# Altium PCB 175-00008 rev 1, PCB, M2 Focus Drive_OLD.PcbDoc (part 1 of 2)
Units mil, origin at the board's own origin, x right, y up, seen from the top; angles counter-clockwise.
Board outline 6885.96 x 6885.86 mil, 8 copper layers (Top Layer (*.GTL), Mid-Layer 1 (*.G1), +24V (*.GP1), GND (*.GP2), +5V (*.GP3), +12V (*.GP4), -12V (*.GP5), Bottom Layer (*.GBL)); 112 components, 149 nets, 812 pads, 83 vias.
Unrouted connection lines stored in the file: 204.
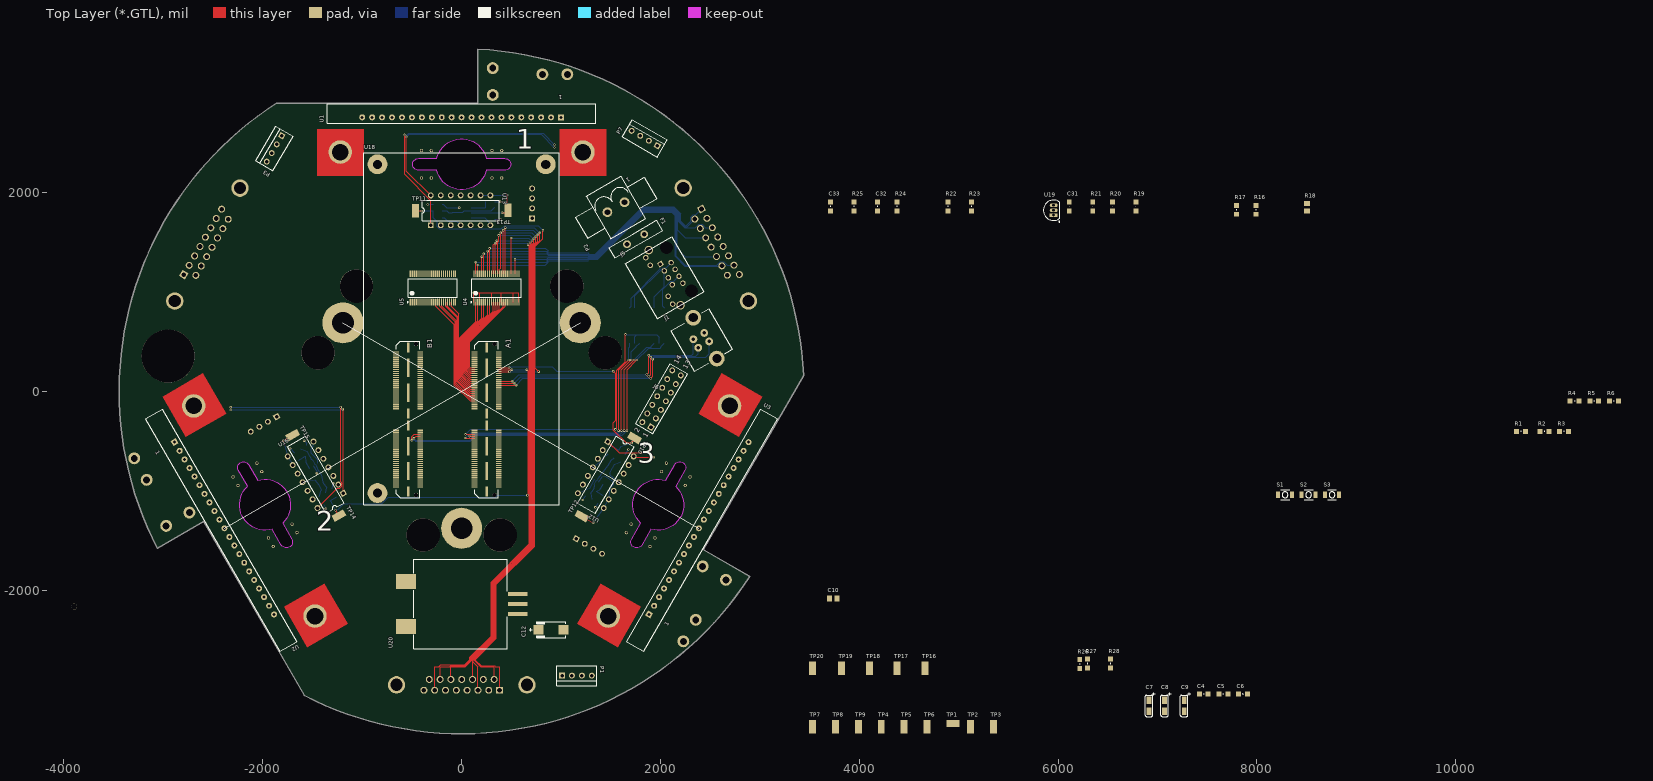
[diagram p0: Top Layer (*.GTL) view]
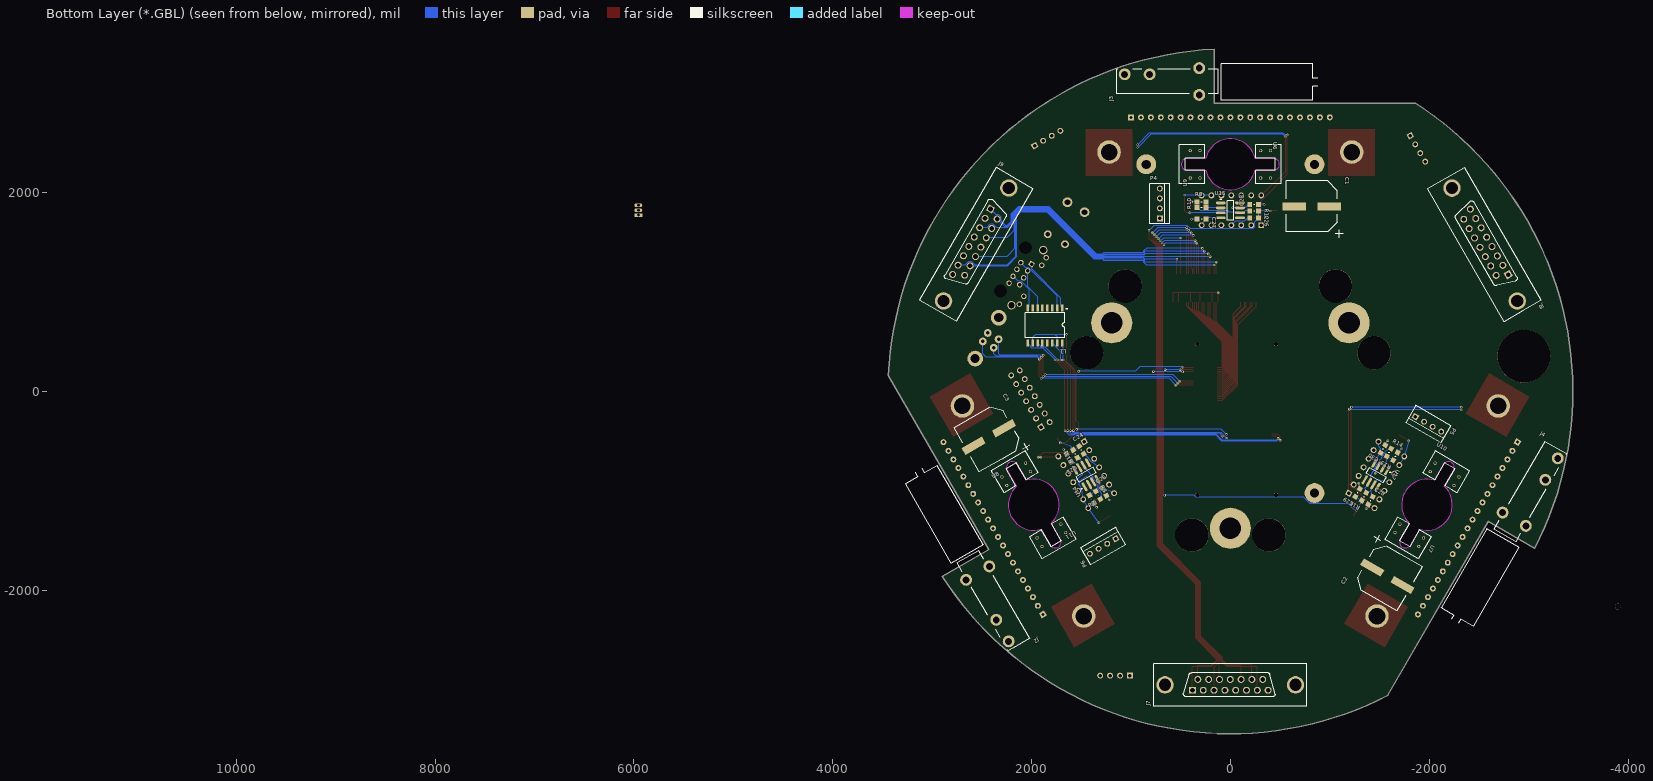
[diagram p1: Bottom Layer (*.GBL) view, seen from below]
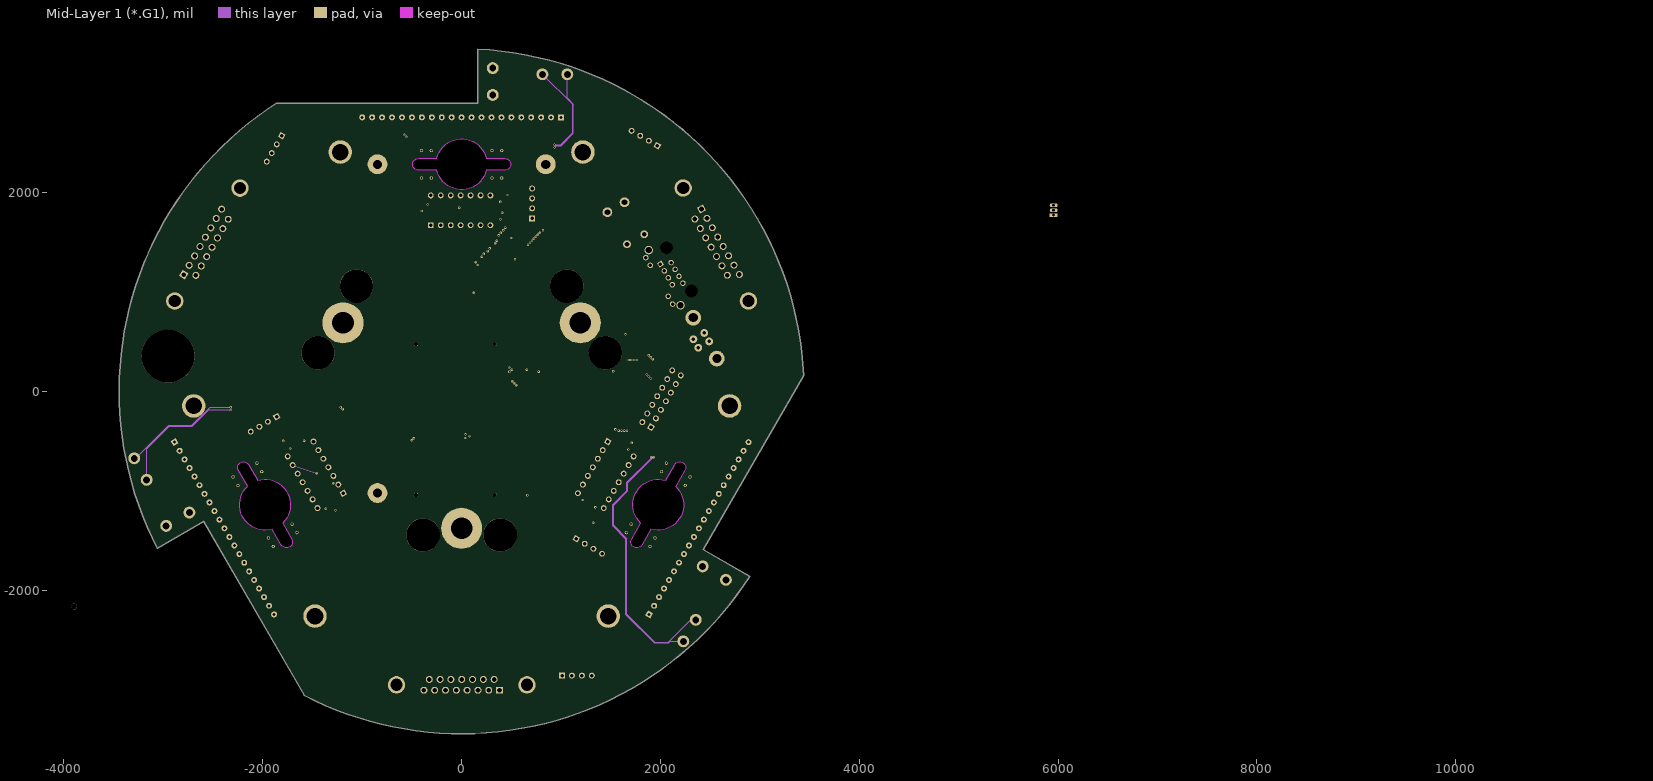
[diagram p2: Mid-Layer 1 (*.G1)]
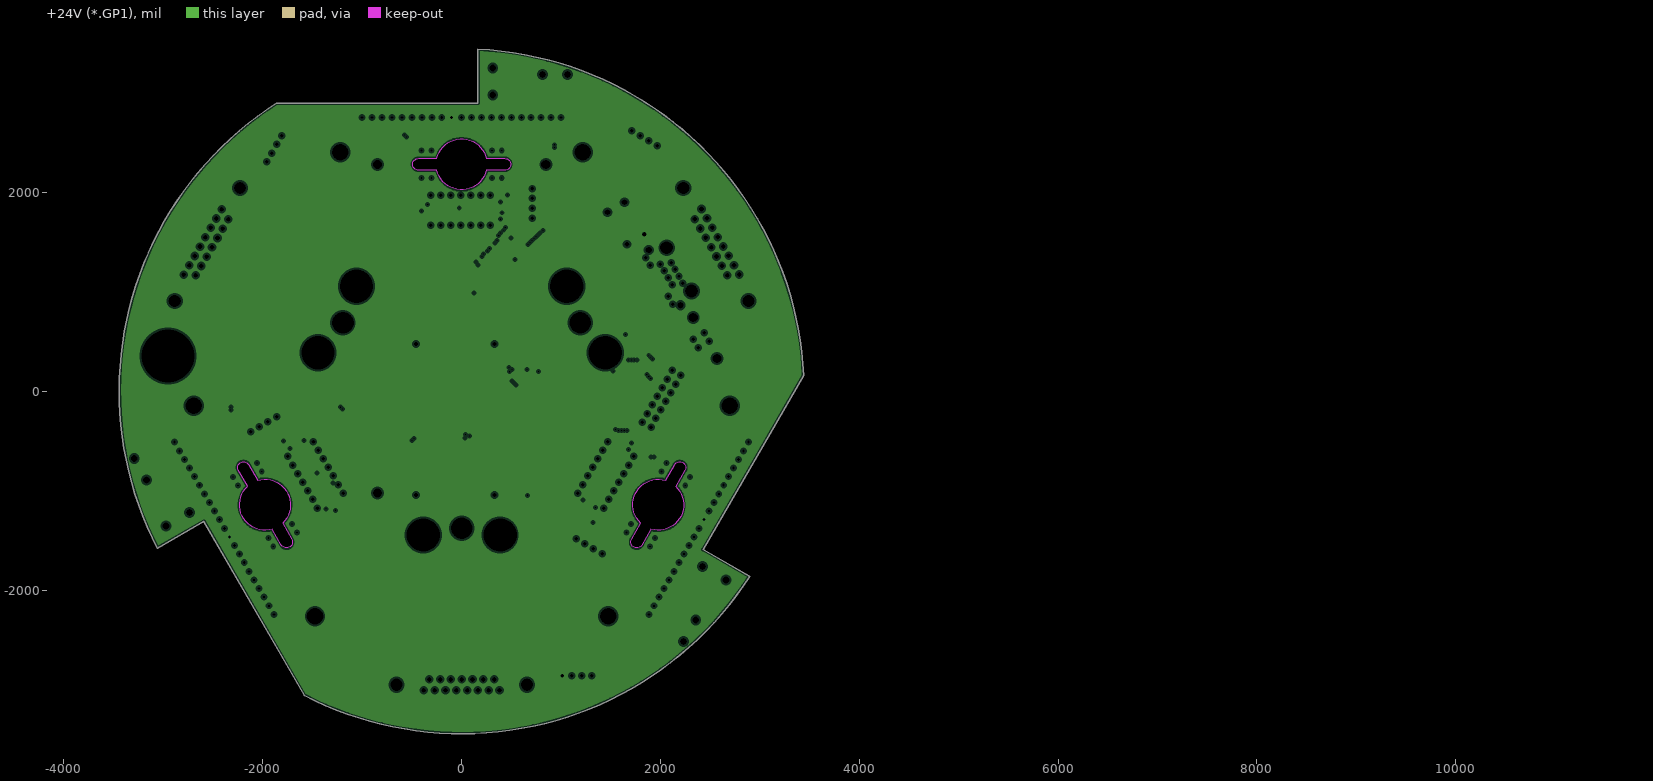
[diagram p3: +24V (*.GP1), clearances drawn from the general rule]
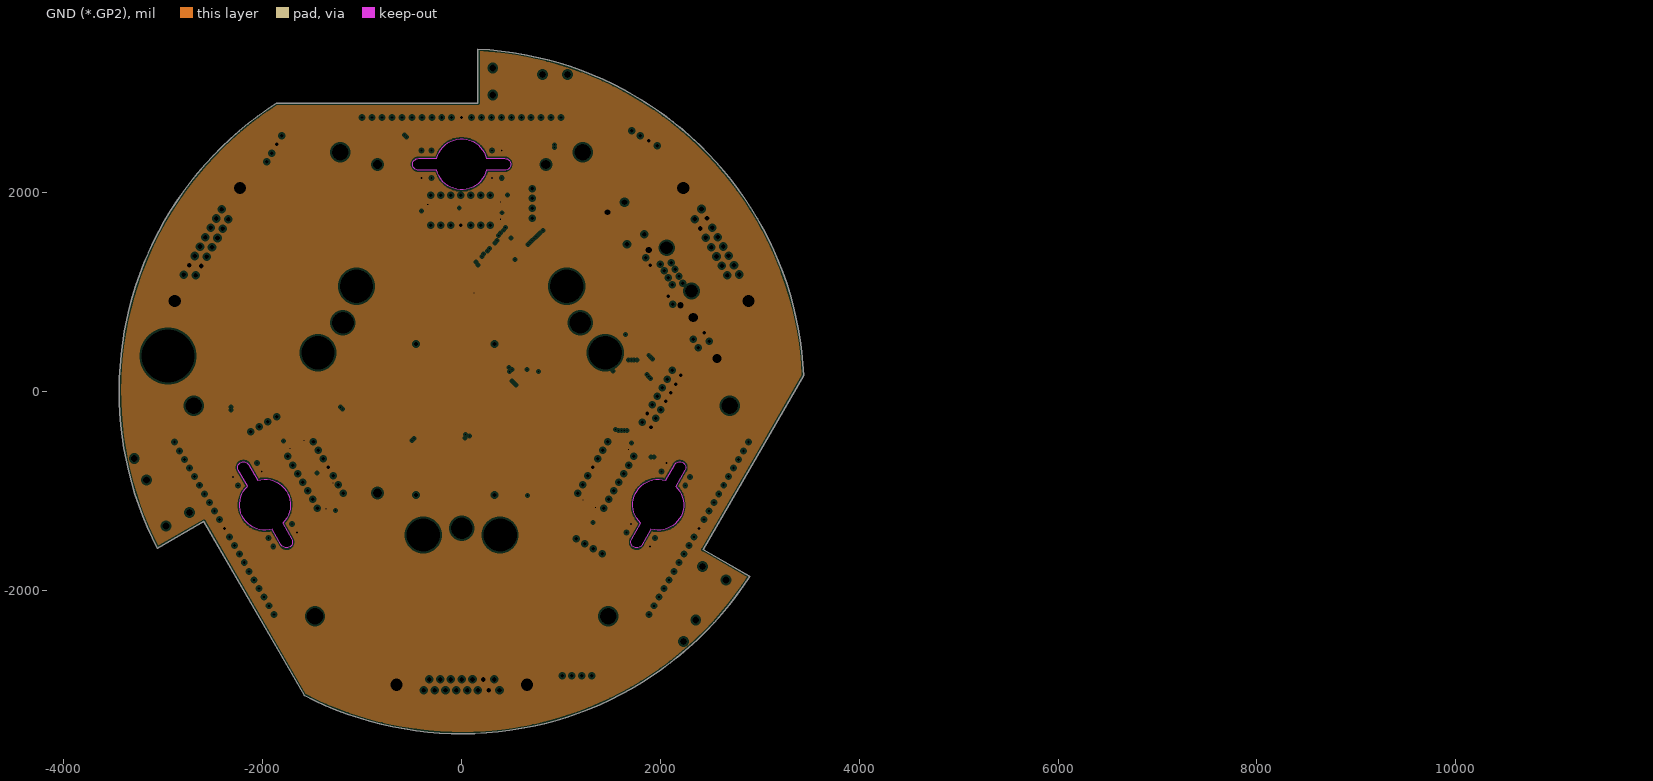
[diagram p4: GND (*.GP2), clearances drawn from the general rule]
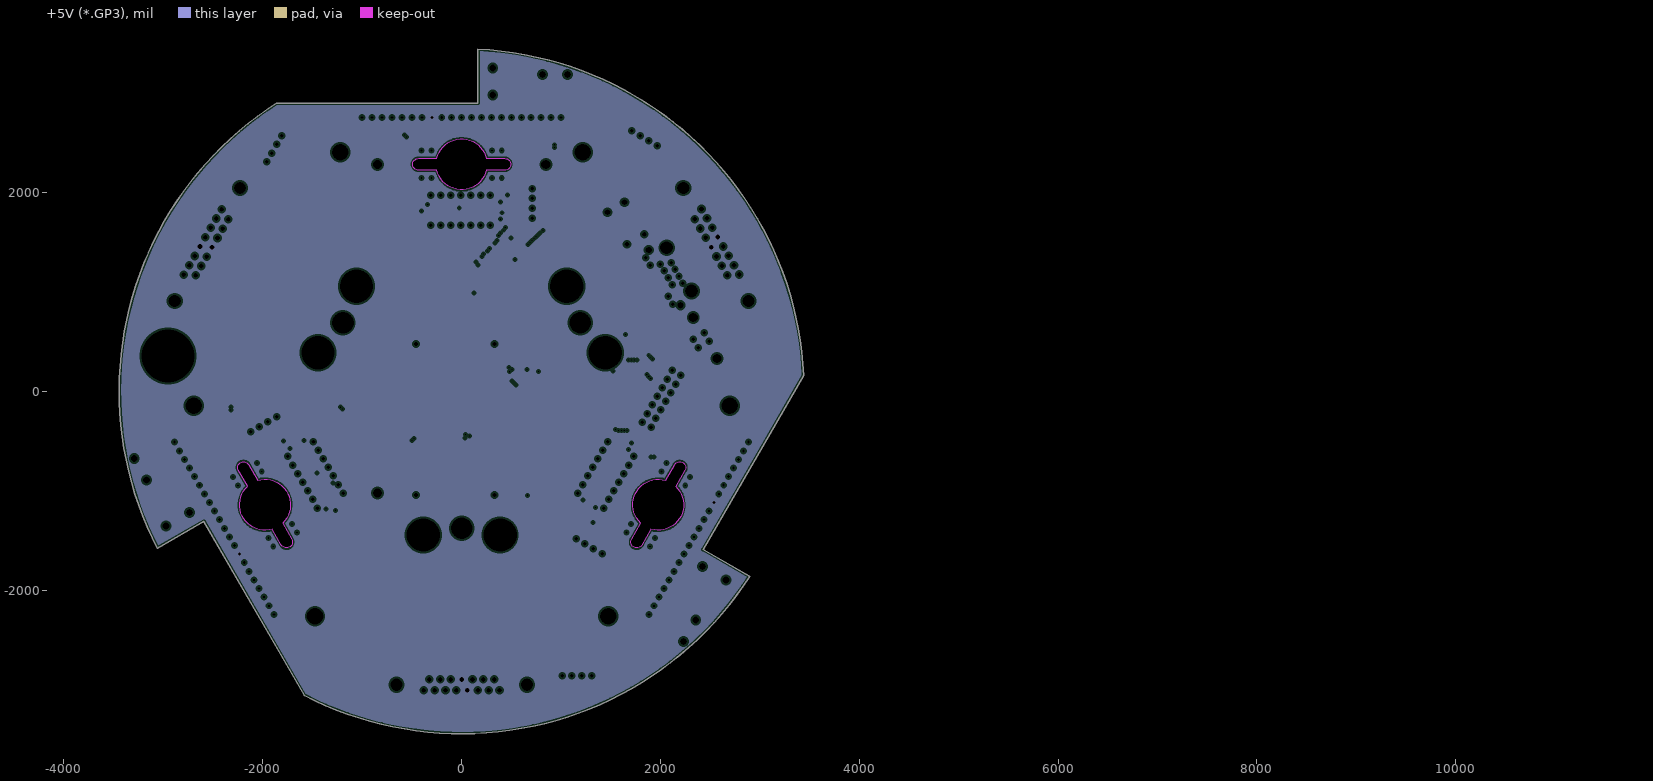
[diagram p5: +5V (*.GP3), clearances drawn from the general rule]
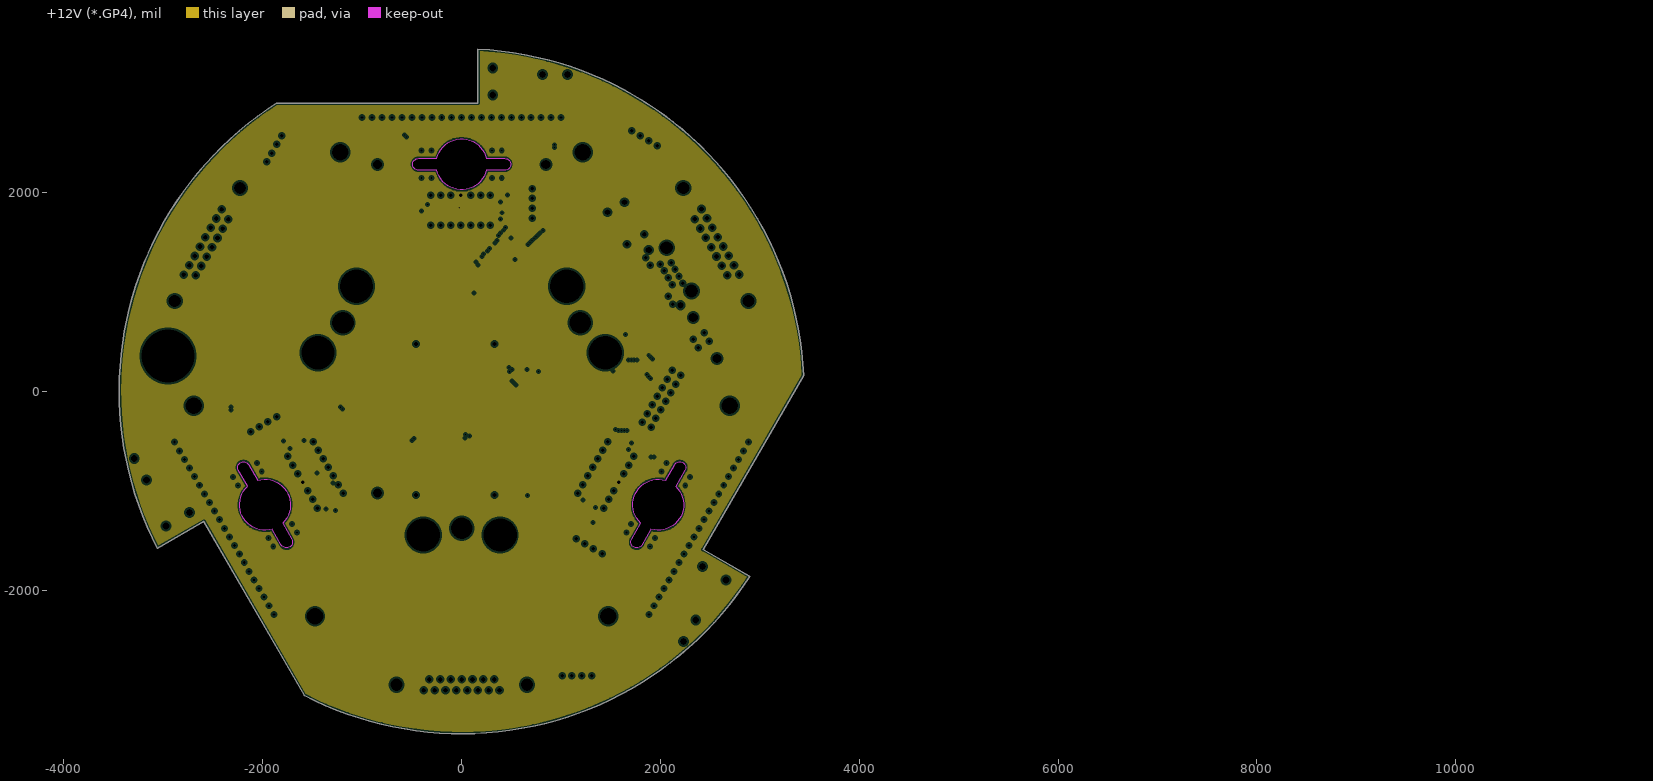
[diagram p6: +12V (*.GP4), clearances drawn from the general rule]
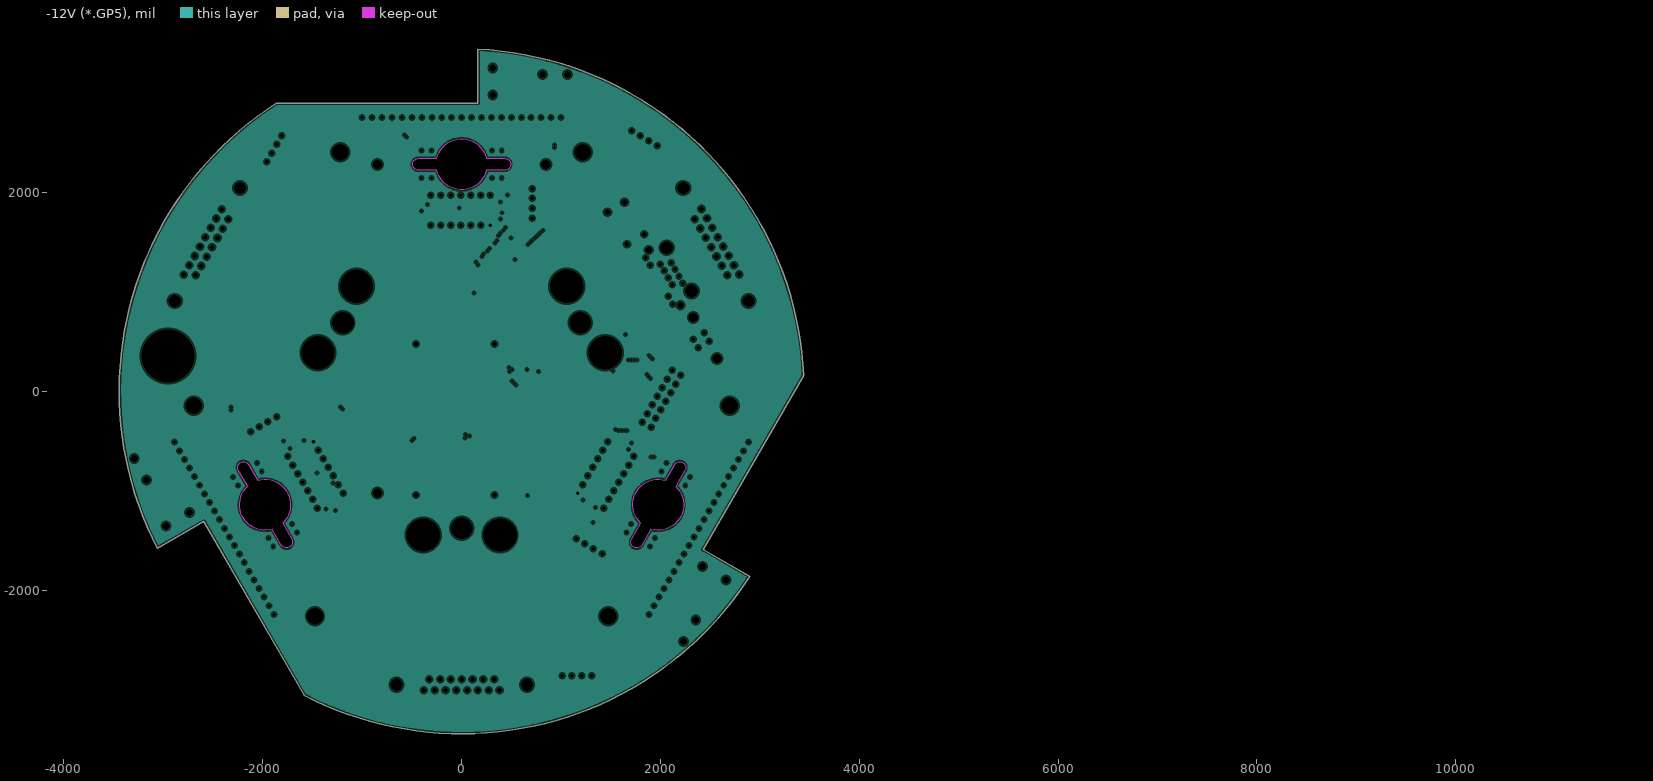
[diagram p7: -12V (*.GP5), clearances drawn from the general rule]

## Layer stack, top to bottom
Top Layer (*.GTL): signal copper 1.4
Dielectric: core 12.6, FR-4, Dk 4.8
Mid-Layer 1 (*.G1): signal copper 1.4
Dielectric: prepreg 12.6, FR-4, Dk 4.8
+24V (*.GP1): plane copper 1.4, net +24V
Dielectric: core 12.6, FR-4, Dk 4.8
GND (*.GP2): plane copper 1.4, net GND
Dielectric: prepreg 12.6, FR-4, Dk 4.8
+5V (*.GP3): plane copper 1.4, net +5V
Dielectric: core 12.6, FR-4, Dk 4.8
+12V (*.GP4): plane copper 1.4, net +12V
Dielectric: prepreg 12.6, FR-4, Dk 4.8
-12V (*.GP5): plane copper 1.4, net -12V
Dielectric: core 12.6, FR-4, Dk 4.8
Bottom Layer (*.GBL): signal copper 1.4

## Board outline
-3061.69,-1579.02 -2592.83,-1308.32 -1581.15,-3060.59 -1475.14,-3113.08 -1367.39,-3161.89 -1258.02,-3206.97 -1147.18,-3248.27 -1034.98,-3285.74 -921.56,-3319.34 -807.06,-3349.02 -691.6,-3374.75 -575.33,-3396.51 -458.38,-3414.26 -340.88,-3427.98 -222.99,-3437.67 -104.84,-3443.3 13.44,-3444.87 131.71,-3442.37 249.82,-3435.82 367.63,-3425.22 485.01,-3410.58 601.82,-3391.91 717.92,-3369.25 833.17,-3342.62 947.44,-3312.04 1060.59,-3277.56 1172.5,-3239.22 1283.02,-3197.05 1392.02,-3151.12 1499.39,-3101.47 1604.99,-3048.16 1708.69,-2991.26 1810.38,-2930.83 1909.94,-2866.95 2007.24,-2799.68 2102.18,-2729.12 2194.64,-2655.34 2284.51,-2578.42 2371.69,-2498.47 2456.07,-2415.57 2537.56,-2329.82 2616.05,-2241.33 2691.46,-2150.19 2763.69,-2056.51 2832.67,-1960.42 2898.3,-1862.01 2429.44,-1591.31 3441.12,160.97 3433.56,279.02 3421.96,396.74 3406.32,513.99 3386.67,630.64 3363.02,746.54 3335.4,861.56 3303.86,975.57 3268.41,1088.42 3229.12,1199.99 3186.01,1310.15 3139.16,1418.76 3088.59,1525.7 3034.39,1630.84 2976.61,1734.06 2915.32,1835.24 2850.59,1934.24 2782.5,2030.97 2711.13,2125.31 2636.57,2217.13 2558.89,2306.35 2478.2,2392.84 2394.58,2476.52 2308.15,2557.27 2218.99,2635.01 2127.21,2709.64 2032.93,2781.07 1936.25,2849.23 1837.28,2914.03 1736.15,2975.39 1632.97,3033.24 1527.87,3087.52 1420.97,3138.15 1312.39,3185.09 1202.26,3228.27 1090.72,3267.64 977.89,3303.16 863.9,3334.79 748.9,3362.48 633.01,3386.21 516.38,3405.95 399.14,3421.67 281.43,3433.36 163.39,3441 163.39,2899.6 -1859.97,2899.6 -1958.43,2834.03 -2054.57,2765.12 -2148.3,2692.95 -2239.49,2617.61 -2328.04,2539.17 -2413.84,2457.75 -2496.8,2373.43 -2576.82,2286.31 -2653.79,2196.49 -2727.64,2104.08 -2798.27,2009.19 -2865.6,1911.94 -2929.56,1812.42 -2990.05,1710.78 -3047.03,1607.11 -3100.41,1501.55 -3150.13,1394.22 -3196.14,1285.24 -3238.39,1174.75 -3276.81,1062.88 -3311.37,949.75 -3342.03,835.5 -3368.74,720.27 -3391.48,604.18 -3410.23,487.39 -3424.95,370.02 -3435.64,252.21 -3442.27,134.11 -3444.85,15.85 -3443.36,-102.44 -3437.81,-220.6 -3428.21,-338.5 -3414.57,-456 -3396.9,-572.96 -3375.23,-689.25 -3349.57,-804.72 -3319.97,-919.25 -3286.45,-1032.69 -3249.06,-1144.91 -3207.84,-1255.79 -3162.83,-1365.18 -3114.1,-1472.97
cut-out: -433.07,2342.51 -249,2342.51 -239.47,2373.67 -226.07,2403.37 -209,2431.13 -188.54,2456.49 -165.02,2479.05 -138.83,2498.43 -110.38,2514.33 -80.15,2526.49 -48.61,2534.7 -16.29,2538.84 16.29,2538.84 48.61,2534.7 80.15,2526.49 110.38,2514.33 138.83,2498.43 165.02,2479.05 188.54,2456.49 209,2431.13 226.07,2403.37 239.48,2373.67 249,2342.51 433.07,2342.51 445.35,2341.22 457.09,2337.41 467.78,2331.23 476.96,2322.97 484.21,2312.98 489.24,2301.7 491.8,2289.63 491.8,2277.28 489.24,2265.21 484.21,2253.93 476.96,2243.94 467.78,2235.68 457.09,2229.51 445.35,2225.69 433.07,2224.4 249,2224.4 239.48,2193.24 226.07,2163.54 209,2135.78 188.54,2110.42 165.02,2087.86 138.83,2068.48 110.38,2052.58 80.15,2040.42 48.61,2032.21 16.29,2028.07 -16.29,2028.07 -48.61,2032.21 -80.15,2040.42 -110.38,2052.58 -138.83,2068.48 -165.02,2087.86 -188.54,2110.42 -209,2135.78 -226.07,2163.54 -239.47,2193.24 -249,2224.4 -433.07,2224.4 -445.35,2225.69 -457.09,2229.51 -467.78,2235.68 -476.96,2243.94 -484.21,2253.93 -489.24,2265.21 -491.8,2277.28 -491.8,2289.63 -489.24,2301.7 -484.21,2312.98 -476.96,2322.97 -467.78,2331.23 -457.09,2337.41 -445.35,2341.22
cut-out: -1801.9,-1327.85 -1709.86,-1487.26 -1704.84,-1498.54 -1702.27,-1510.62 -1702.27,-1522.96 -1704.84,-1535.04 -1709.86,-1546.32 -1717.12,-1556.31 -1726.29,-1564.57 -1736.98,-1570.74 -1748.72,-1574.56 -1761,-1575.85 -1773.28,-1574.56 -1785.02,-1570.74 -1795.71,-1564.57 -1804.89,-1556.31 -1812.15,-1546.32 -1904.18,-1386.91 -1935.93,-1394.24 -1968.36,-1397.48 -2000.93,-1396.58 -2033.12,-1391.54 -2064.42,-1382.45 -2094.3,-1369.46 -2122.29,-1352.77 -2147.94,-1332.67 -2170.82,-1309.47 -2190.56,-1283.55 -2206.86,-1255.32 -2219.43,-1225.26 -2228.08,-1193.85 -2232.67,-1161.59 -2233.13,-1129 -2229.44,-1096.63 -2221.66,-1064.98 -2209.93,-1034.58 -2194.43,-1005.92 -2175.41,-979.46 -2153.18,-955.63 -2245.22,-796.22 -2250.24,-784.94 -2252.81,-772.86 -2252.81,-760.52 -2250.24,-748.44 -2245.22,-737.16 -2237.96,-727.18 -2228.79,-718.91 -2218.09,-712.74 -2206.35,-708.93 -2194.07,-707.64 -2181.8,-708.93 -2170.05,-712.74 -2159.36,-718.91 -2150.19,-727.18 -2142.93,-737.16 -2050.89,-896.58 -2019.14,-889.24 -1986.72,-886 -1954.15,-886.91 -1921.95,-891.95 -1890.66,-901.03 -1860.78,-914.03 -1832.79,-930.71 -1807.14,-950.82 -1784.26,-974.02 -1764.51,-999.94 -1748.22,-1028.16 -1735.65,-1058.22 -1726.99,-1089.64 -1722.4,-1121.9 -1721.95,-1154.48 -1725.64,-1186.86 -1733.42,-1218.5 -1745.15,-1248.9 -1760.65,-1277.56 -1779.67,-1304.02
cut-out: 2245.22,-796.22 2153.18,-955.63 2175.41,-979.46 2194.43,-1005.92 2209.93,-1034.58 2221.66,-1064.98 2229.44,-1096.63 2233.13,-1129 2232.67,-1161.59 2228.08,-1193.85 2219.43,-1225.26 2206.86,-1255.32 2190.56,-1283.55 2170.82,-1309.47 2147.94,-1332.67 2122.29,-1352.77 2094.3,-1369.46 2064.42,-1382.45 2033.12,-1391.54 2000.93,-1396.58 1968.36,-1397.48 1935.93,-1394.24 1904.18,-1386.91 1812.15,-1546.32 1804.89,-1556.31 1795.71,-1564.57 1785.02,-1570.74 1773.28,-1574.56 1761,-1575.85 1748.72,-1574.56 1736.98,-1570.74 1726.29,-1564.57 1717.12,-1556.31 1709.86,-1546.32 1704.84,-1535.04 1702.27,-1522.96 1702.27,-1510.62 1704.84,-1498.54 1709.86,-1487.27 1801.9,-1327.85 1779.67,-1304.02 1760.65,-1277.56 1745.15,-1248.9 1733.42,-1218.5 1725.64,-1186.86 1721.95,-1154.48 1722.4,-1121.9 1726.99,-1089.64 1735.65,-1058.22 1748.22,-1028.16 1764.51,-999.94 1784.26,-974.02 1807.14,-950.82 1832.79,-930.71 1860.78,-914.03 1890.66,-901.03 1921.95,-891.95 1954.15,-886.91 1986.72,-886 2019.14,-889.24 2050.89,-896.58 2142.93,-737.16 2150.19,-727.18 2159.36,-718.91 2170.05,-712.74 2181.8,-708.93 2194.07,-707.64 2206.35,-708.93 2218.09,-712.74 2228.79,-718.91 2237.96,-727.18 2245.22,-737.16 2250.24,-748.44 2252.81,-760.52 2252.81,-772.86 2250.24,-784.94

## Design rules (kind name [scope] priority, off if disabled: settings)
Clearance [All] p1: gap=4
ComponentClearance [(HasFootprint('SuperFin Footprint'))] p1: gap=-400 collisioncheckmode=3 verticalgap=-400 showdistances=TRUE
PlaneClearance [All] p1: clearance=20
PlaneConnect [All] p1: planeconnectstyle=Relief reliefexpansion=20 reliefentries=4 reliefconductorwidth=10 reliefairgap=10
PolygonConnect [All] p1: connectstyle=Relief reliefconductorwidth=10 reliefentries=4 polygonreliefangle="90 Angle"
RoomDefinition "780-00012-P4, Sch M2 Focus Drive" [InComponentClass('780-00012-P4, Sch M2 Focus Drive')] p1: confinementstyle=ConfineIn formatcopy=TRUE lockcomponents=FALSE outline -4098.88,-4399.81 11936,-4399.81 11936,3645 -4098.88,3645
RoomDefinition "780-00012-P3, Sch M2 Focus Drive" [InComponentClass('780-00012-P3, Sch M2 Focus Drive')] p2: confinementstyle=ConfineIn formatcopy=TRUE lockcomponents=FALSE outline -4031.88,-4366.81 12058,-4366.81 12058,3809 -4031.88,3809
RoomDefinition "780-00012-P2, Sch M2 Focus Drive" [InComponentClass('780-00012-P2, Sch M2 Focus Drive')] p3: confinementstyle=ConfineIn formatcopy=TRUE lockcomponents=FALSE outline -4081.88,-4282.81 11868,-4282.81 11868,3706 -4081.88,3706
RoomDefinition "780-00012-P1, Sch M2 Focus Drive" [InComponentClass('780-00012-P1, Sch M2 Focus Drive')] p4: confinementstyle=ConfineIn formatcopy=TRUE lockcomponents=FALSE outline -4065.88,-4232.81 12126,-4232.81 12126,4034 -4065.88,4034
RoutingVias [All] p1: holewidth=10 width=24 viastyle="Through Hole" minholewidth=10 minwidth=24 maxholewidth=10 maxwidth=24
SilkscreenOverComponentPads [All] p1: minsilkscreentomaskgap=10
SolderMaskExpansion [All] p1: expansion=4
Width [All] p1: maxlimit=100 minlimit=5 preferedwidth=5
24 further rules are at their usual default settings.

## Classes and differential pairs
component class "780-00012-P4, Sch M2 Focus Drive": C10 C12 C31 C32 C33 F1 P1 P2 P3 P7 R19 R20 R21 R22 R23 R24 R25 TP16 TP17 TP18 TP19 TP20 U19 U20
component class "780-00012-P3, Sch M2 Focus Drive": J1 J5 J6 L1 R16 R17 R18 U18
component class "780-00012-P2, Sch M2 Focus Drive": C22 C23 C24 C25 C26 C27 C28 C29 C30 J2 J3 J4 R1 R2 R3 R4 R5 R6 R7 R8 R9 R10 R11 R12 R13 R14 R15 R26 R27 R28 TP10 TP11 TP12 TP13 TP14 TP15 U6 U7 U8 U9 U10 U11 U12 U13 U14 U15 U16 U17
component class "780-00012-P1, Sch M2 Focus Drive": C1 C2 C3 C4 C5 C6 C7 C8 C9 J7 J8 J9 P4 P5 P6 S1 S2 S3 TP1 TP2 TP3 TP4 TP5 TP6 TP7 TP8 TP9 U1 U2 U3 U4 U5

## Components (designator, comment, footprint, x,y, rotation, side; value= is the part's Value field where it differs from the comment)
C1 "63V" "CAP 220UF 63V" -820,1860 r270 bottom
C2 "63V" "CAP 220UF 63V" -1580,-1860 r120 bottom
C3 "63V" "CAP 220UF 63V" 2430,-460 r240 bottom
C4 "Cap SMD" SMD_0805 7465.32,-3045.9 r0 top
C5 "Cap SMD" SMD_0805 7662.17,-3045.9 r0 top
C6 "Cap SMD" SMD_0805 7859.02,-3045.9 r0 top
C7 "16V" SMD_CAP_3216 6914.14,-3164.01 r90 top
C8 "16V" SMD_CAP_3216 7071.62,-3164.01 r90 top
C9 "16V" SMD_CAP_3216 7268.47,-3164.01 r90 top
C10 "1u" 2012[0805] 3739.12,-2082.81 r0 top
C12 "10V" SMD_CAP_7343 900,-2400 r180 top
C22 "Cap SMD" SMD_0805 1625,-670 r240 bottom
C23 "Cap SMD" SMD_0805 -240,1880 r0 bottom
C24 "Cap SMD" SMD_0805 1499,-590 r60 bottom
C25 "Cap SMD" SMD_0805 1270,-1010 r60 bottom
C26 "Cap SMD" SMD_0805 -240,1745 r180 bottom
C27 "Cap SMD" SMD_0805 289,1732 r180 bottom
C28 "Cap SMD" SMD_0805 -1410,-1100 r120 bottom
C29 "Cap SMD" SMD_0805 -1280,-1020 r300 bottom
C30 "Cap SMD" SMD_0805 -1535,-580 r300 bottom
C31 "Cap SMD" SMD_0805 6112.48,1860.68 r90 top
C32 "Cap SMD" SMD_0805 4183.35,1860.68 r90 top
C33 "Cap SMD" SMD_0805 3710.9,1860.68 r90 top
F1 "RUEF400" "PolySwitch Radial 0.2" 1750,1530 r30 top
J1 "61729-0010BLF" "USB Vertical PCB" 2330,740 r120 top
J2 "PCC-SMP-V-K" THERMOCOUPLE 2658.93,-1896.56 r240 bottom
J3 "PCC-SMP-V-K" THERMOCOUPLE 312.99,3250.97 r0 bottom
J4 "PCC-SMP-V-K" THERMOCOUPLE -2971.92,-1354.44 r120 bottom
J5 "RJHSE-3381" "RJ45, VERT MOUNT, NO MAGNETICS" 2000,1280 r120 top
J6 "15-91-0140" HDR2X7 1905,-360 r60 top
J7 "DSUB 15" "DSUB15 PCB VERT Female" 0.87,-2952.76 r0 bottom
J8 "DSUB 15" "DSUB15 PCB VERT Female" -2557.6,1475.62 r240 bottom
J9 "DSUB 15" "DSUB15 PCB VERT Female" 2556.73,1477.12 r120 bottom
L1 "S558-5999-J1-F" "10/100BT Magetics module" 1690,840 r0 bottom
P1 "Header 4" "HDR1X4 for IDC" 1010,-2860 r0 top
P2 "Header PWR 2 Pin" "HDR-2 pin w/screw" 1550,1850 r210 top
P3 "Header 4" "HDR1X4 for IDC" -1810,2570 r240 top
P4 "Header 4" "HDR1X4 for IDC" 709,1740 r90 bottom
P5 "Header 4" "HDR1X4 for IDC" -1861.38,-255.99 r210 bottom
P6 "Header 4" "HDR1X4 for IDC" 1152.38,-1484.01 r330 bottom
P7 "Header 4" "HDR1X4 for IDC" 1970,2470 r150 top
R1 "Res 0805" SMD_0805 10656.64,-402.87 r0 top
R2 "Res 0805" SMD_0805 10892.86,-402.87 r0 top
R3 "Res 0805" SMD_0805 11089.71,-402.87 r0 top
R4 "Res 0805" SMD_0805 11196.62,-96.39 r0 top
R5 "Res 0805" SMD_0805 11393.47,-96.39 r0 top
R6 "Res 0805" SMD_0805 11590.32,-96.39 r0 top
R7 "Res 0805" SMD_0805 1395,-1085 r60 bottom
R8 "Res 0805" SMD_0805 1330,-1045 r240 bottom
R9 "Res 0805" SMD_0805 290,1905 r180 bottom
R10 "Res 0805" SMD_0805 290,1850 r0 bottom
R11 "Res 0805" SMD_0805 1560,-630 r60 bottom
R12 "Res 0805" SMD_0805 -240,1815 r180 bottom
R13 "Res 0805" SMD_0805 -1660,-655 r300 bottom
R14 "Res 0805" SMD_0805 -1595,-615 r120 bottom
R15 "Res 0805" SMD_0805 -1345,-1060 r300 bottom
R16 "Res 0805" SMD_0805 7992.1,1826.04 r90 top
R17 "Res 0805" SMD_0805 7795.25,1826.04 r90 top
R18 "4.7k" 2012[0805] 8503.91,1851.35 r90 top
R19 "Res 0805" SMD_0805 6781.77,1860.68 r90 top
R20 "Res3" smd_0805 6545.55,1860.68 r90 top
R21 "Res SMD" SMD_0805 6348.7,1860.68 r90 top
R22 "Res3" smd_0805 4892.01,1860.68 r90 top
R23 "Res3" smd_0805 5128.23,1860.68 r90 top
R24 "Res SMD" SMD_0805 4380.2,1860.68 r90 top
R25 "Res SMD" SMD_0805 3947.12,1860.68 r90 top
R26 "Res 0805" SMD_0805 6218,-2744 r90 top
R27 "Res 0805" SMD_0805 6297.12,-2738.25 r90 top
R28 "Res 0805" SMD_0805 6527.12,-2738.25 r90 top
S1 "B3U-1000P" B3U-1000P 8283.23,-1041.27 r0 top
S2 "B3U-1000P" B3U-1000P 8519.45,-1041.27 r0 top
S3 "B3U-1000P" B3U-1000P 8755.67,-1041.27 r0 top
TP1 "Test Point SMD" "SMD_TEST POINT" 4943.12,-3342.81 r0 top
TP2 "Test Point SMD" "SMD_TEST POINT" 5121.12,-3375.81 r90 top
TP3 "Test Point SMD" "SMD_TEST POINT" 5351.12,-3375.81 r90 top
TP4 "Test Point SMD" "SMD_TEST POINT" 4221.12,-3375.81 r90 top
TP5 "Test Point SMD" "SMD_TEST POINT" 4451.12,-3375.81 r90 top
TP6 "Test Point SMD" "SMD_TEST POINT" 4681.12,-3375.81 r90 top
TP7 "Test Point SMD" "SMD_TEST POINT" 3531.12,-3375.81 r90 top
TP8 "Test Point SMD" "SMD_TEST POINT" 3761.12,-3375.81 r90 top
TP9 "Test Point SMD" "SMD_TEST POINT" 3991.12,-3375.81 r90 top
TP10 "Test Point SMD" "SMD_TEST POINT" 1740,-470 r330 top
TP11 "Test Point SMD" "SMD_TEST POINT" -465,1815 r90 top
TP12 "Test Point SMD" "SMD_TEST POINT" 1210,-1255 r150 top
TP13 "Test Point SMD" "SMD_TEST POINT" 465,1820 r270 top
TP14 "Test Point SMD" "SMD_TEST POINT" -1235,-1250 r30 top
TP15 "Test Point SMD" "SMD_TEST POINT" -1700,-440 r30 top
TP16 "Test Point SMD" "SMD_TEST POINT" 4661.12,-2785.81 r90 top
TP17 "Test Point SMD" "SMD_TEST POINT" 4381.12,-2785.81 r90 top
TP18 "Test Point SMD" "SMD_TEST POINT" 4101.12,-2785.81 r90 top
TP19 "Test Point SMD" "SMD_TEST POINT" 3821.12,-2785.81 r90 top
TP20 "Test Point SMD" "SMD_TEST POINT" 3531.12,-2785.81 r90 top
U1 "IM481H Plus" "IM481H Vertical" 1000,2755.9 r180 top
U2 "IM481H Plus" "IM481H Vertical" -2886.68,-511.94 r300 top
U3 "IM481H Plus" "IM481H Vertical" 1886.68,-2243.99 r60 top
U4 "SN74AHCT16244DGGR" DGG048_N 350,1040 r90 top
U5 "SN74AHCT16244DGGR" DGG048_N -290,1040 r90 top
U6 "EE-SX1046" Photo-sensor -305.12,2421.25 r270 bottom
U7 "EE-SX1046" Photo-sensor -1944.31,-1474.88 r30 bottom
U8 "EE-SX1046" Photo-sensor 2249.43,-946.4 r150 bottom
U9 "EE-SX1046" Photo-sensor 305.12,2145.66 r90 bottom
U10 "EE-SX1046" Photo-sensor -2010.76,-808.6 r210 bottom
U11 "EE-SX1046" Photo-sensor 1705.65,-1337.08 r330 bottom
U12 "AD595AQ" Q-14_A 1450,-840 r240 top
U13 "AD595AQ" Q-14_A -10,1820 r0 top
U14 "LT1007CS8#PBF" S8_M 1450,-840 r60 bottom
U15 "LT1007CS8#PBF" S8_M 0,1820 r180 bottom
U16 "AD595AQ" Q-14_A -1470,-840 r120 top
U17 "LT1007CS8#PBF" S8_M -1465,-845 r300 bottom
U18 "SuperFin Module" "SuperFin Footprint" 846.46,-1023.63 r90 top locked
U19 "LM335Z" Z03A 5955,1821.31 r0 top
U20 "PT78ST105S" PSIP_3_SMD -10,-2140 r90 top

## Footprints (in the part's own frame and the unit in brackets; to place one, negate y for a bottom-side part, rotate by r counter-clockwise, add the part's x,y. Pads: shape width x height; smd on the part's side, far side on the other; paste and mask are expansions set on the pad)
"10/100BT Magetics module" [mil] "bel p/n S558-6-5999-J1-F"
  rect 25x70 smd: 1(0,0) 2(50,0) 3(100,0) 4(150,0) 5(200,0) 6(250,0) 7(300,0) 8(350,0) 9(350,355) 10(300,355) 11(250,355) 12(200,355) 13(150,355) 14(100,355) 15(50,355) 16(0,355)
  silkscreen extent -50,5 375,300
2012[0805] [mm] "Chip Resistor; Body 2.0 x 1.3 mm (LxW typ)"
  rect 1.3x1.5 smd: 1(-0.95,0) 2(0.95,0)
B3U-1000P [mil] "Pushbutton without ground terminal, without boss"
  rect 40x67 smd: 1(-71,0) 2(71,0)
  silkscreen extent -45,-50 45,50
"CAP 220UF 63V" [mm] "United Chemi-Con size KG5"
  rect 2x6 smd: 1(0,4.475) 2(0,-4.475)
  silkscreen extent -6.5,-6.5 8,8
DGG048_N [mm] "TSSOP, 48-Leads, Body 12.5x6.1mm, Pitch 0.5mm, IPC Medium Density"
  oval 1.75x0.3 smd: 1(-3.625,5.75) 2(-3.625,5.25) 3(-3.625,4.75) 4(-3.625,4.25) 5(-3.625,3.75) 6(-3.625,3.25) 7(-3.625,2.75) 8(-3.625,2.25) 9(-3.625,1.75) 10(-3.625,1.25) 11(-3.625,0.75) 12(-3.625,0.25) 13(-3.625,-0.25) 14(-3.625,-0.75) 15(-3.625,-1.25) 16(-3.625,-1.75) 17(-3.625,-2.25) 18(-3.625,-2.75) 19(-3.625,-3.25) 20(-3.625,-3.75) 21(-3.625,-4.25) 22(-3.625,-4.75) 23(-3.625,-5.25) 24(-3.625,-5.75) 25(3.625,-5.75) 26(3.625,-5.25) 27(3.625,-4.75) 28(3.625,-4.25) 29(3.625,-3.75) 30(3.625,-3.25) 31(3.625,-2.75) 32(3.625,-2.25) 33(3.625,-1.75) 34(3.625,-1.25) 35(3.625,-0.75) 36(3.625,-0.25) 37(3.625,0.25) 38(3.625,0.75) 39(3.625,1.25) 40(3.625,1.75) 41(3.625,2.25) 42(3.625,2.75) 43(3.625,3.25) 44(3.625,3.75) 45(3.625,4.25) 46(3.625,4.75) 47(3.625,5.25) 48(3.625,5.75)
  silkscreen extent -3.75,-6.3 2.35,6.57, body extent -3.1,-6.3 3.1,6.3, height 1.2
"DSUB15 PCB VERT Female" [mil] "NorComp p/n 172-015-212R911"
  rect 70x70 hole 47: 1(380.52,54.36)
  round 70 hole 47: 2(271.8,54.36) 3(163.08,54.36) 4(54.36,54.36) 5(-54.36,54.36) 6(-163.08,54.36) 7(-271.8,54.36) 8(-380.52,54.36) 9(326.16,-54.36) 10(217.44,-54.36) 11(108.72,-54.36) 12(0,-54.36) 13(-108.72,-54.36) 14(-217.44,-54.36) 15(-326.16,-54.36)
  round 175 hole 123: 16(656,0) 17(-656,0)
  silkscreen extent -771,-214 770,215
"HDR1X4 for IDC" [mm] "Connector; Header; 4 Position"
  rect 1.5x1.5 hole 0.9: 1(0,0)
  round 1.5 hole 0.9: 2(2.54,0) 3(5.08,0) 4(7.62,0)
  silkscreen extent -1.4,-2.54 8.89,2.54
HDR2X7 [mm] "Connector; Header; 7x2 Position"
  rect 1.5x1.5 hole 0.9: 1(0,0)
  round 1.5 hole 0.9: 2(0,2.54) 3(2.54,0) 4(2.54,2.54) 5(5.08,0) 6(5.08,2.54) 7(7.62,0) 8(7.62,2.54) 9(10.16,0) 10(10.16,2.54) 11(12.7,0) 12(12.7,2.54) 13(15.24,0) 14(15.24,2.54)
  silkscreen extent -1.27,-1.27 16.51,3.81
"HDR-2 pin w/screw" [mm] "TYCO p/n 796867-2"
  round 2.5 hole 1.5: 1(-2.62,0) 2(2.46,0)
  silkscreen extent -10.16,-6.25 10.16,6.25
"IM481H Vertical" [mil] "Stepper motor driver"
  rect 60x60 hole 30 unplated: 1(0,0)
  round 60 hole 30 unplated: 2(100,0) 3(200,0) 4(300,0) 5(400,0) 6(500,0) 7(600,0) 8(700,0) 9(800,0) 10(900,0) 11(1000,0) 12(1100,0) 13(1200,0) 14(1300,0) 15(1400,0) 16(1500,0) 17(1600,0) 18(1700,0) 19(1800,0) 20(1900,0) 21(2000,0)
  silkscreen extent -350,-138 2350,59
Photo-sensor [mm] "Omron EE-SX1046"
  round 0.8 hole 0.5: A(0,2.5) C(7,0) E(7,2.5) K(0,0)
  silkscreen extent -1.5,-1.25 8.5,5.25
"PolySwitch Radial 0.2" [mm] "PolySwitch footprint"
  round 2 hole 1.2: 1(-2.54,0) 2(2.54,0)
  silkscreen extent -7,-1.5 7,1.5
PSIP_3_SMD [mil] "Plastic Single-In-Line Module, 3 pins"
  rect 150x200 smd: 0(-225,550) 0(225,550)
  rect 40x200 smd: 1(100,-575) 2(0,-575) 3(-100,-575)
  silkscreen extent -450,-470 450,470
Q-14_A [mm] "DIP; 14 Leads; Row Spacing 7.62 mm; Pitch 2.54 mm"
  rect 1.5x1.5 hole 0.9: 1(-7.62,-3.81)
  round 1.5 hole 0.9: 2(-5.08,-3.81) 3(-2.54,-3.81) 4(0,-3.81) 5(2.54,-3.81) 6(5.08,-3.81) 7(7.62,-3.81) 8(7.62,3.81) 9(5.08,3.81) 10(2.54,3.81) 11(0,3.81) 12(-2.54,3.81) 13(-5.08,3.81) 14(-7.62,3.81)
  silkscreen extent -9.85,-2.65 9.85,2.65
"RJ45, VERT MOUNT, NO MAGNETICS" [mil] "Amphenol p/n RJHSE-3381"
  rect 55x55 hole 35: 1(0,0)
  round 55 hole 35: 2(-40,-100) 3(-80,0) 4(-120,-100) 5(-160,0) 6(-200,-100) 7(-240,0) 8(-280,-100) 9(130,95) 10(40,95) 11(-320,95) 12(-410,95)
  round 85 hole 62: 13(180,32) 14(-460,32)
  round 116.14 hole 127.95 unplated: MH1(110,-135) MH2(-390,-135)
  silkscreen extent -460,-235 180,305
S8_M [mm] "SOIC, 8-Leads, Body 4.9x3.9mm, Pitch 1.27mm, IPC Low Density"
  oval 2.5x0.7 smd: 1(-2.45,1.905) 2(-2.45,0.635) 3(-2.45,-0.635) 4(-2.45,-1.905) 5(2.45,-1.905) 6(2.45,-0.635) 7(2.45,0.635) 8(2.45,1.905)
  silkscreen extent -2.57,-2.5 0.8,2.93, body extent -2,-2.5 2,2.5, height 1.76
SMD_0805 [mil]
  rect 50x50 smd: 1(-45,0) 2(45,0)
  silkscreen extent -1,-1 1,1
smd_0805 [mil]
  rect 50x50 smd: 1(-45,0) 2(45,0)
  silkscreen extent -1,-1 1,1
SMD_CAP_3216 [mil]
  rect 78x48 smd: 1(55,0) 2(-55,0)
  silkscreen extent -108,-65 134,38
SMD_CAP_7343 [mil]
  rect 102x94 smd: NEG(-126,0) POS(126,0)
  silkscreen extent -145,-80 220,80
"SMD_TEST POINT" [mil] "Keystone 5015"
  rect 135x70 smd: 1(0,0)
"SuperFin Footprint" [mm] "SAMTEC QTH-060-01-L-D-A (x2)"
  round 5.08 hole 2.311: 0(0,43) 0(84,0) 0(84,43)
  round 1 hole 1.02 unplated: 0(38.04,13.08) 0(38.04,33.15) 1(-0.44,33.15) 1(-0.44,13.08)
  rect 0.3x1.45 smd paste+0 mask+0.05: A1(36.05,12.03) A2(36.05,18.21) A2(36.05,18.21) A3(35.55,12.03) A4(35.55,18.21) A5(35.05,12.03) A6(35.05,18.21) A7(34.55,12.03) A8(34.55,18.21) A9(34.05,12.03) A10(34.05,18.21) A11(33.55,12.03) A12(33.55,18.21) A13(33.05,12.03) A14(33.05,18.21) A15(32.55,12.03) A16(32.55,18.21) A17(32.05,12.03) A18(32.05,18.21) A19(31.55,12.03) A20(31.55,18.21) A21(31.05,12.03) A22(31.05,18.21) A23(30.55,12.03) A24(30.55,18.21) A25(30.05,12.03) A26(30.05,18.21) A27(29.55,12.03) A28(29.55,18.21) A29(29.05,12.03) A30(29.05,18.21) A31(28.55,12.03) A32(28.55,18.21) A33(28.05,12.03) A34(28.05,18.21) A35(27.55,12.03) A36(27.55,18.21) A37(27.05,12.03) A38(27.05,18.21) A39(26.55,12.03) A40(26.55,18.21) A41(26.05,12.03) A42(26.05,18.21) A43(25.55,12.03) A44(25.55,18.21) A45(25.05,12.03) A46(25.05,18.21) A47(24.55,12.03) A48(24.55,18.21) A49(24.05,12.03) A50(24.05,18.21) A51(23.55,12.03) A52(23.55,18.21) A53(23.05,12.03) A54(23.05,18.21) A55(22.55,12.03) A56(22.55,18.21) A57(22.05,12.03) A58(22.05,18.21) A59(21.55,12.03) A60(21.55,18.21) A61(16.05,12.03) A62(16.05,18.21) A62(16.05,18.21) A63(15.55,12.03) A64(15.55,18.21) A65(15.05,12.03) A66(15.05,18.21) A67(14.55,12.03) A68(14.55,18.21) A69(14.05,12.03) A70(14.05,18.21) A71(13.55,12.03) A72(13.55,18.21) A73(13.05,12.03) A74(13.05,18.21) A75(12.55,12.03) A76(12.55,18.21) A77(12.05,12.03) A78(12.05,18.21) A79(11.55,12.03) A80(11.55,18.21) A81(11.05,12.03) A82(11.05,18.21) A83(10.55,12.03) A84(10.55,18.21) A85(10.05,12.03) A86(10.05,18.21) A87(9.55,12.03) A88(9.55,18.21) A89(9.05,12.03) A90(9.05,18.21) A91(8.55,12.03) A92(8.55,18.21) A93(8.05,12.03) A94(8.05,18.21) A95(7.55,12.03) A96(7.55,18.21) A97(7.05,12.03) A98(7.05,18.21) A99(6.55,12.03) A100(6.55,18.21) A101(6.05,12.03) A102(6.05,18.21) A103(5.55,12.03) A104(5.55,18.21) A105(5.05,12.03) A106(5.05,18.21) A107(4.55,12.03) A108(4.55,18.21) A109(4.05,12.03) A110(4.05,18.21) A111(3.55,12.03) A112(3.55,18.21) A113(3.05,12.03) A114(3.05,18.21) A115(2.55,12.03) A116(2.55,18.21) A117(2.05,12.03) A118(2.05,18.21) A119(1.55,12.03) A120(1.55,18.21) B1(36.05,32.1) B2(36.05,38.28) B2(36.05,38.28) B3(35.55,32.1) B4(35.55,38.28) B5(35.05,32.1) B6(35.05,38.28) B7(34.55,32.1) B8(34.55,38.28) B9(34.05,32.1) B10(34.05,38.28) B11(33.55,32.1) B12(33.55,38.28) B13(33.05,32.1) B14(33.05,38.28) B15(32.55,32.1) B16(32.55,38.28) B17(32.05,32.1) B18(32.05,38.28) B19(31.55,32.1) B20(31.55,38.28) B21(31.05,32.1) B22(31.05,38.28) B23(30.55,32.1) B24(30.55,38.28) B25(30.05,32.1) B26(30.05,38.28) B27(29.55,32.1) B28(29.55,38.28) B29(29.05,32.1) B30(29.05,38.28) B31(28.55,32.1) B32(28.55,38.28) B33(28.05,32.1) B34(28.05,38.28) B35(27.55,32.1) B36(27.55,38.28) B37(27.05,32.1) B38(27.05,38.28) B39(26.55,32.1) B40(26.55,38.28) B41(26.05,32.1) B42(26.05,38.28) B43(25.55,32.1) B44(25.55,38.28) B45(25.05,32.1) B46(25.05,38.28) B47(24.55,32.1) B48(24.55,38.28) B49(24.05,32.1) B50(24.05,38.28) B51(23.55,32.1) B52(23.55,38.28) B53(23.05,32.1) B54(23.05,38.28) B55(22.55,32.1) B56(22.55,38.28) B57(22.05,32.1) B58(22.05,38.28) B59(21.55,32.1) B60(21.55,38.28) B61(16.05,32.1) B62(16.05,38.28) B62(16.05,38.28) B63(15.55,32.1) B64(15.55,38.28) B65(15.05,32.1) B66(15.05,38.28) B67(14.55,32.1) B68(14.55,38.28) B69(14.05,32.1) B70(14.05,38.28) B71(13.55,32.1) B72(13.55,38.28) B73(13.05,32.1) B74(13.05,38.28) B75(12.55,32.1) B76(12.55,38.28) B77(12.05,32.1) B78(12.05,38.28) B79(11.55,32.1) B80(11.55,38.28) B81(11.05,32.1) B82(11.05,38.28) B83(10.55,32.1) B84(10.55,38.28) B85(10.05,32.1) B86(10.05,38.28) B87(9.55,32.1) B88(9.55,38.28) B89(9.05,32.1) B90(9.05,38.28) B91(8.55,32.1) B92(8.55,38.28) B93(8.05,32.1) B94(8.05,38.28) B95(7.55,32.1) B96(7.55,38.28) B97(7.05,32.1) B98(7.05,38.28) B99(6.55,32.1) B100(6.55,38.28) B101(6.05,32.1) B102(6.05,38.28) B103(5.55,32.1) B104(5.55,38.28) B105(5.05,32.1) B106(5.05,38.28) B107(4.55,32.1) B108(4.55,38.28) B109(4.05,32.1) B110(4.05,38.28) B111(3.55,32.1) B112(3.55,38.28) B113(3.05,32.1) B114(3.05,38.28) B115(2.55,32.1) B116(2.55,38.28) B117(2.05,32.1) B118(2.05,38.28) B119(1.55,32.1) B120(1.55,38.28)
  rect 2.54x0.64 smd: A121(20.355,15.12) A121(37.245,15.12) A122(0.355,15.12) A122(17.245,15.12) B121(20.355,35.19) B121(37.245,35.19) B122(0.355,35.19) B122(17.245,35.19)
  rect 4.7x0.64 smd: A121(25.625,15.12) A121(31.975,15.12) A122(5.625,15.12) A122(11.975,15.12) B121(25.625,35.19) B121(31.975,35.19) B122(5.625,35.19) B122(11.975,35.19)
  silkscreen extent -3,-3.5 87,46.5
THERMOCOUPLE [mil] "Omega, PCB mount, vertical"
  round 120 hole 70 unplated: 0(0,0) 0(0,270) 1(500,62) 2(750,62)
  silkscreen extent -1190,-45 830,325
"USB Vertical PCB" [mm] "EDAC USB typeB p/n 690-004-260-023"
  round 2 hole 0.92: 1(-4.77,2.71) 2(-7.27,2.71) 3(-7.27,-0.49) 4(-4.77,-0.49)
  round 4 hole 2.3: 5(-12.04,0) 6(0,0)
  silkscreen extent -12,-4.6 0,6.6
Z03A [mm] "TO, Flat Index; 3 In-Line, Axial Leads; Body Dia. 5mm; Leads 0.55 x 0.50 mm (max)"
  rect 2x1 hole 0.75: 1(0,-1.27)
  oval 2x1 hole 0.75: 2(0,0) 3(0,1.27)
  silkscreen extent -2.6,-3.02 1.61,2.6, body extent -2.61,-2.61 1.6,2.61, height 5.2

## Part data
C1 C2 C3: library part "Cap 220uF, 63V", "CAP 220UF 63V ELECT MVH SMD"
C4 C5 C6 C22 C23 C24 C25 C26 C27 C28 C29 C30 C31 C32 C33: "Capacitor"
C7 C8 C9: library part "Cap Tant 16V", "outline 3.2mm x 1.6mm"
C10: library part Cap, "Capacitor"
C12: library part "Cap Tant 35V", "outline 6.0mm x 3.2mm"
F1: library part "Fuse Thermal", "PolySwitch RUE Series"
J1: library part "Header 6", "Header, 6-Pin"
J2 J3 J4: library part "Thermocouple Connector", "T/C Conn PCB mount vertical"
J5: library part "CONN RJ-45 w/o magnetics", "Vertical PC mount, w/o magnetics"
J6: library part "Header 7X2", "Header, 7-Pin, Dual row"
J7 J8 J9: "Receptacle Assembly, 15 Position"
L1: library part "Ethernet Magnetics module", "10/100BT Magnetics Module"
P1 P3 P4 P5 P6 P7: "Header, 4-Pin"
P2: library part "Header 2 PWR", "Header, 2-Pin"
R1 R2 R3 R4 R5 R6 R7 R8 R9 R10 R11 R12 R13 R14 R15 R16 R17 R19 R26 R27 R28: library part "Res SMD", "Resistor 0805"
R18: library part Res3, "Resistor"
R20 R21 R22 R23 R24 R25: "Resistor"
S1 S2 S3: library part SW-PB, "Switch"
TP1 TP2 TP3 TP4 TP5 TP6 TP7 TP8 TP9 TP10 TP11 TP12 TP13 TP14 TP15 TP16 TP17 TP18 TP19 TP20: "SMD loop test point"
U1 U2 U3: "Hybrid stepper motor driver"
U4 U5: "16-Bit Buffer/Driver with 3-State Outputs"
U6 U7 U8 U9 U10 U11: library part Photo-sensor, "Omron EE-SX1046"
U12 U13 U16: "Monolithic Thermocouple Amplifier with Cold Junction Compensation"
U14 U15 U17: "Low Noise BJT input opamp"
U19: "Precision Temperature Sensor"
U20: library part "Volt Reg", "Voltage Regulator"

## Free pads (board coordinates)
  round 59.06 hole 59.06 unplated: 0(-3897.64,-2165.35)
  round 531.25 hole 531.25 unplated: 1(-2952.76,354.32)
  round 236.22 hole 166.14: 1(-2695,-147) 1(-1475,-2261) 1(-1220,2407) 1(1220,2407) 1(1475,-2261) 1(2695,-147)
  round 334.65 hole 334.65 unplated: 1(-1445.09,387.2) 1(-1057.88,1057.87) 1(-387.21,-1445.1) 1(387.21,-1445.1) 1(1057.88,1057.87) 1(1445.09,387.2)
  round 413.39 hole 216.54: 1(-1193.34,688.97) 1(0,-1377.96) 1(1193.34,688.97)

## Via types
v1: diameter 24, hole 10, Top Layer (*.GTL) to Bottom Layer (*.GBL), 83 vias